# Altium PCB RX.PCBDOC
Units mil, origin at the board's own origin, x right, y up, seen from the top; angles counter-clockwise.
Board outline 1033.41 x 1033.93 mil, 4 copper layers (Top Layer, MidLayer1, MidLayer2, Bottom Layer); 70 components, 48 nets, 215 pads, 52 vias.
Unrouted connection lines stored in the file: 1.
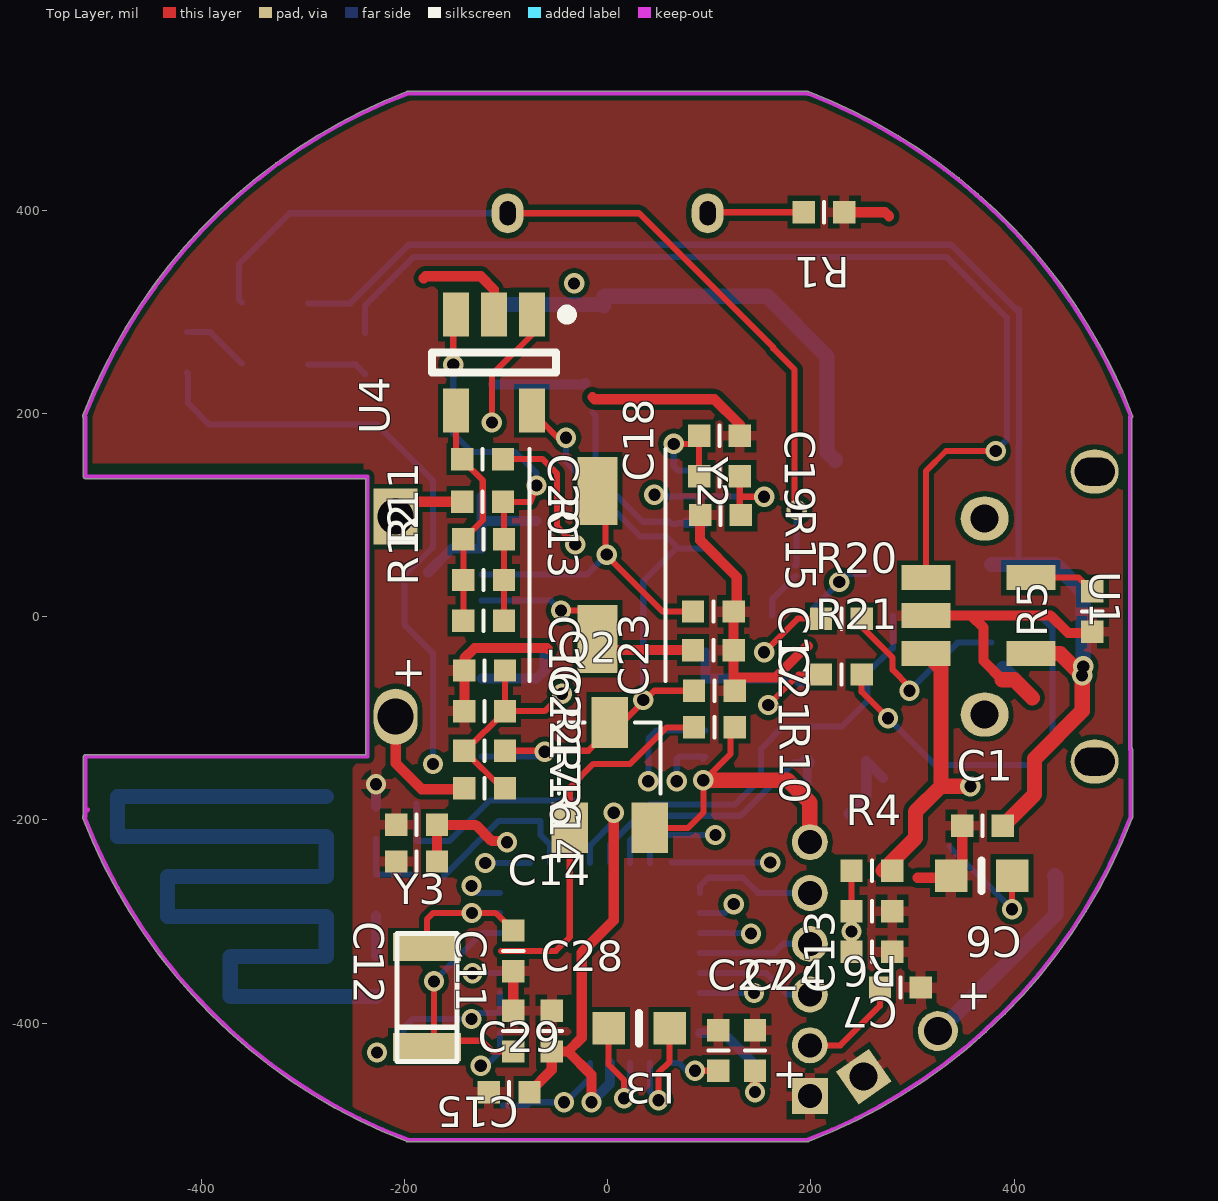
[diagram p0: Top Layer view]
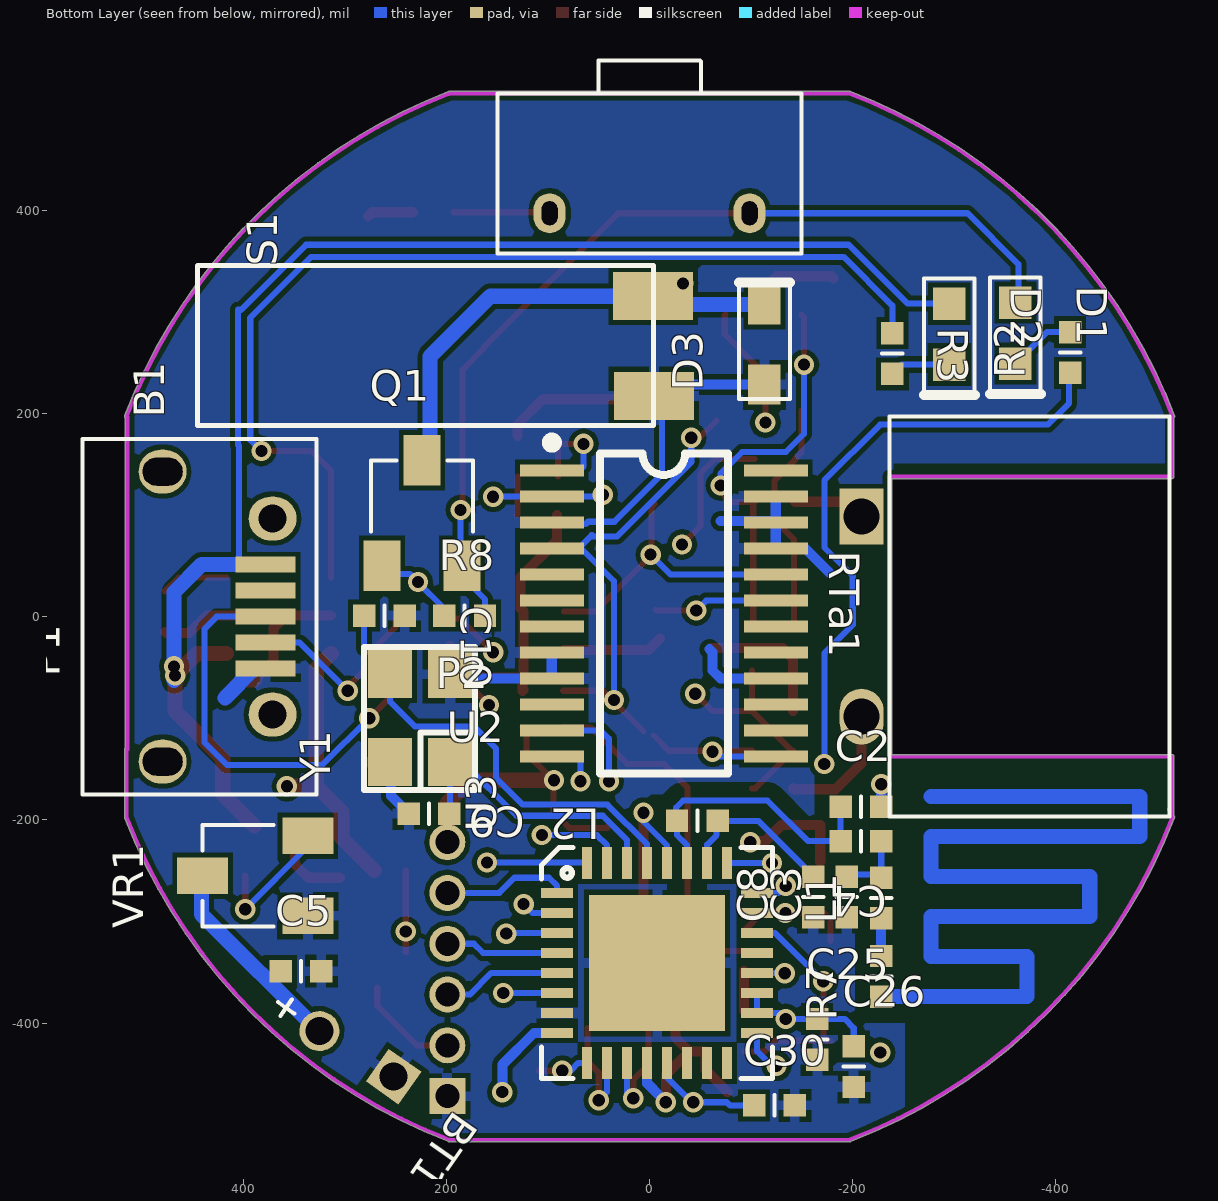
[diagram p1: Bottom Layer view, seen from below]
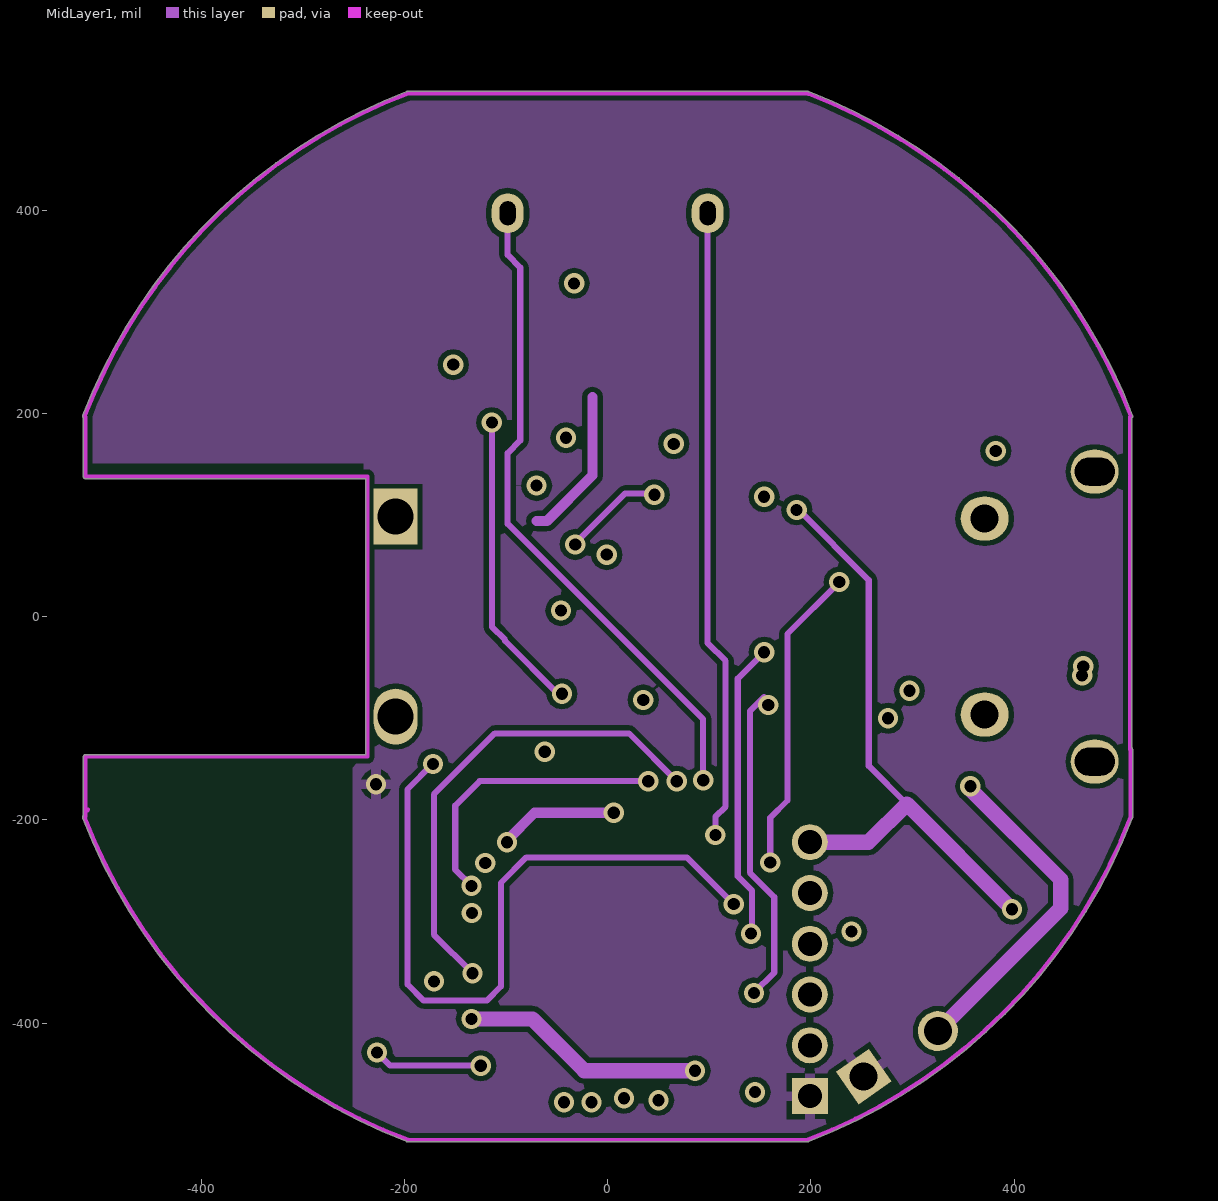
[diagram p2: MidLayer1]
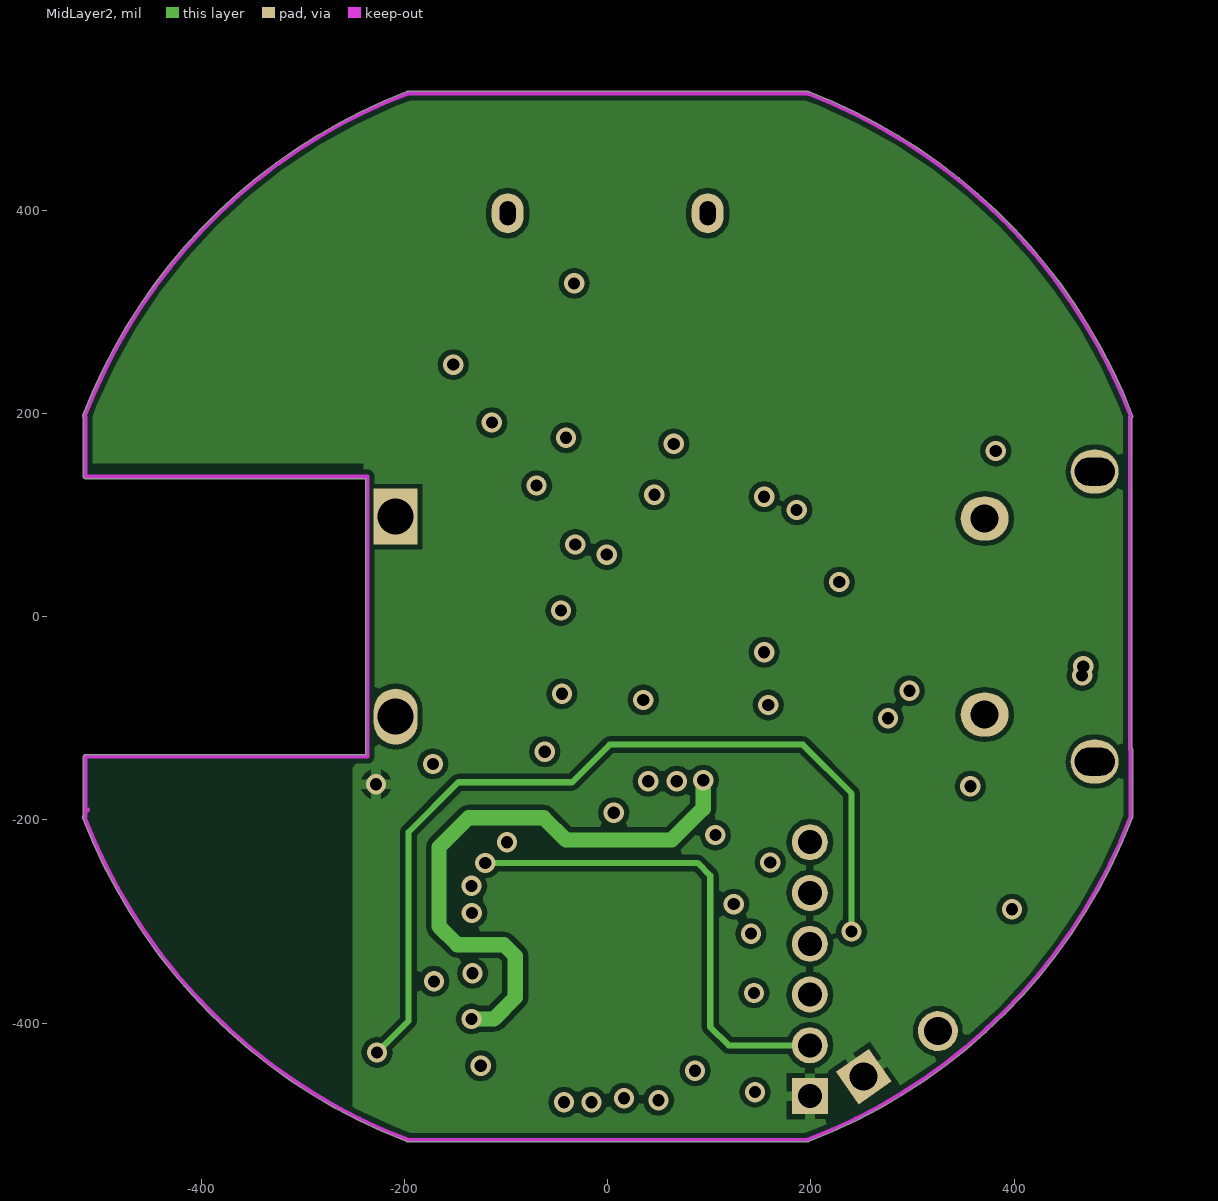
[diagram p3: MidLayer2]

## Layer stack, top to bottom
Top Layer: signal copper 1.4
Dielectric: prepreg 12.6, FR-4, Dk 4.8
MidLayer1: signal copper 1.4
Dielectric: core 12.6, FR-4, Dk 4.8
MidLayer2: signal copper 1.4
Dielectric: prepreg 12.6, FR-4, Dk 4.8
Bottom Layer: signal copper 1.4

## Board outline
-516.46,-198.15 cw(c-514.61,-197.44) -516.49,-198.06 cw(c-514.67,-197.26) -516.08,-195.86 -515.98,-195.76 -515.98,-137.8 cw(c-514,-137.8) -514,-135.81 -238.2,-135.81 -238.2,135.81 -514,135.81 cw(c-514,137.8) -515.98,137.8 -515.98,195.6 cw(c-514.72,197.13) -516.58,197.84 cw(c0,0) -198.23,516.43 cw(c-196.85,515) -196.85,516.98 196.85,516.98 cw(c196.85,515) 198.23,516.43 cw(c0,0) 516.58,197.84 cw(c514.72,197.13) 516.71,197.13 cw(c514.72,197.13) 515.98,195.6 515.98,-129.18 cw(c514.61,-130.61) 516.59,-130.61 516.59,-197.44 cw(c514.61,-197.44) 516.46,-198.15 cw(c0,0) 198.15,-516.46 cw(c196.85,-514.96) 196.85,-516.94 -196.85,-516.94 cw(c-196.85,-514.96) -198.15,-516.46 cw(c0,0)

## Design rules (kind name [scope] priority, off if disabled: settings)
Clearance Clearance_1 [InNetClass('RF')] p1: gap=15
Clearance [All] p2: gap=5
ComponentClearance [All] p1: gap=5 collisioncheckmode=3 verticalgap=5 showdistances=FALSE
FabricationTestpoint [(IsPad And (OnTopLayer Or OnBottomLayer))] p1: side=3 testpointundercomponent=TRUE minsize=40 maxsize=100 preferedsize=60 minholesize=0 maxholesize=40 preferedholesize=32 testpointgrid=1 allowsidetop=TRUE allowsidebottom=TRUE usegrid=TRUE gridtolerance=0.01
PolygonConnect [All] p1: connectstyle=Relief reliefconductorwidth=10 reliefentries=4 polygonreliefangle="90 Angle"
RoutingCorners [All] p1: cornerstyle=Round minsetback=100 maxsetback=100
RoutingVias [All] p1: holewidth=12 width=20 viastyle="Through Hole" minholewidth=12 minwidth=20 maxholewidth=28 maxwidth=50
SilkscreenOverComponentPads SilkToSolderMaskClearance [IsPad] p1: minsilkscreentomaskgap=10
SolderMaskExpansion [All] p1: expansion=4
Width [All] p1: maxlimit=15 minlimit=6 preferedwidth=6
24 further rules are at their usual default settings.

## Classes and differential pairs
net class RF: NetC2_1 NetC3_2 NetE1_1 NetL1_1

## Components (designator, comment, footprint, x,y, rotation, side; value= is the part's Value field where it differs from the comment)
B1 "Motor" "MOTO-40*44*114 - 3D" -4,267 r90 bottom
BT1 "Battery" BT 325,-408 r215 bottom
C1 "1uF" 0402 349,-206 r0 top
C2 "1.2pF/10V" 0402 -188,-187 r180 bottom
C3 "1.8pF/10V" 0402 -194,-296 r90 bottom
C4 "220pF/10V" 0402 -228,-221 r0 bottom
C5 "1uF" 0402 363,-349 r180 bottom
C6 "22uF" 0603 398,-255 r180 top
C7 "100nF" 0402 280,-330 r180 top
C8 "18pF/10V" 0402 -161,-296 r90 bottom
C9 "12pF" 0402 197,-194 r0 bottom
C10 "12pF" 0402 281,1 r180 bottom
C11 "0.1uF/10V" 0402 -208,-205 r0 top
C12 "2.2uF/10V" 0402 -208,-241 r0 top
C13 "1uF/10V" 0402 308,-365 r180 top
C14 "6pF" 0402 -93,-349 r90 top
C15 "6pF" 0402 -93,-388 r270 top
C16 "Cap" 0402 -142,-4 r0 top
C17 "Cap" 0402 84,5 r0 top
C18 "Cap" 0402 130,138 r180 top
C19 "Cap" 0402 90,178 r0 top
C20 "Cap" 0402 -143,155 r0 top
C21 "Cap" 0402 84,-33 r0 top
C22 "Cap" 0402 -141,-53 r0 top
C23 "0.1uF" 0402 125,-73 r180 top
C24 "1uF/10V" 0402 145,-407 r270 top
C25 "0.1uF/10V" 0402 -165,-436 r90 bottom
C26 "1uF/10V" 0402 -201,-463 r90 bottom
C27 "1uF/10V" 0402 109,-407 r270 top
C28 "1uF/10V" 0402 -55,-388 r270 top
C29 "0.1uF/10V" 0402 -117,-468 r0 top
C30 "1uF/10V" 0402 -143,-481 r0 bottom
D1 "LEDG" LED0603#1 -360,279 r270 bottom
D2 "LEDR" LED0603#1 -295,278 r270 bottom
D3 "IN4148" LED0603#2 -113,269 r90 bottom
L1 "1.8nH" 0402 -228,-297 r90 bottom
L2 "1.3nH" 0402 -67,-201 r0 bottom
L3 "47uH" 0603 61,-405 r180 top
P1 "microUSB" MICROUSB 377.95,0 r90 bottom
P2 "Header 6" SIP6-1.27 199,-472 r90 bottom
Q1 "AO3401A" AO3401 224,102 r180 bottom
Q2 "AO3401A" AO3401 2,-156 r0 top
R1 "10K" 0402 233,398 r180 top
R2 "1K" 0402 -414,240 r90 bottom
R3 "1K" 0402 -239,279 r270 bottom
R4 "2M" 0402 240,-250 r0 top
R5 "2K" 0402 477,-15 r90 top
R6 "200K" 0402 280,-290 r180 top
R7 "0" 0402 -228,-374 r90 bottom
R8 "10K" 0402 202,1 r180 bottom
R10 "10K" 0402 85,-109 r0 top
R11 "Res2" 0402 -102,76 r180 top
R12 "Res2" 0402 -102,36 r180 top
R13 "Res2" 0402 -143,113 r0 top
R14 "Res2" 0402 -141,-169 r0 top
R15 "Res2" 0402 91,100 r0 top
R16 "Res2" 0402 -141,-132 r0 top
R17 "Res2" 0402 -141,-93 r0 top
R20 "0R" 0402 210,-2 r0 top (schematic designator R5)
R21 "0R" 0402 210,-57 r0 top (schematic designator R5)
RTa1 "RX-40K" US-10MM -196.85,0 r180 bottom
S1 "开关" SW3x6x5 0,397 r0 bottom
U1 "TP4054" TP4054 365,1 r270 top
U2 "TLSR8258F512ET32" QFN-32 91,-272 r180 bottom
U3 "CS102" TSSOP24 -14,3 r90 bottom
U4 "LMV321" MF05A_N -112,250 r90 top
VR1 "MCP33" MCP33 440,-255 r90 bottom
Y1 "24M" XTAL4TN_3225 226,-100 r90 bottom
Y2 "8M" 5032 -10,51 r270 top
Y3 "32.768K" XTAL3215 -178,-325 r270 top

## Footprints (in the part's own frame and the unit in brackets; to place one, negate y for a bottom-side part, rotate by r counter-clockwise, add the part's x,y. Pads: shape width x height; smd on the part's side, far side on the other; paste and mask are expansions set on the pad)
0402 [mil]
  rect 22x22 smd: 1(0,0) 2(40,0)
  silkscreen extent 20,-10 20,10
0603 [mil]
  rect 32x32 smd: 1(0,0) 2(60,0)
  silkscreen extent 30,-15 30,15
5032 [mm]
  rect 1.7x1 smd: 1(-1.85,0) 2(1.85,0)
  silkscreen extent -2.9,-1.7 2.9,1.7
AO3401 [mm]
  rect 0.915x1.27 smd: 1(-1,-1.318) 2(1,-1.318) 3(0,1.318)
  silkscreen extent -1.27,-0.46 1.27,1.32
BT [mm]
  round 1 hole 0.7: 1(0,0)
  rect 1x1 hole 0.7: 2(2.172,0.133)
  silkscreen extent -1.27,-0.25 -0.76,0.25
LED0603#1 [mil]
  rect 32x32 smd: 1(-30,0) 2(30,0)
  silkscreen extent -55,-25 60,25
LED0603#2 [mil]
  rect 39.37x32 smd: 1(-40.65,0) 2(38.09,0)
  silkscreen extent -55,-25 60,25
MCP33 [mm]
  rect 0.915x1.27 smd: 1(0,0) 2(-1,-2.635) 3(1,-2.635)
  silkscreen extent -1.27,-1.78 1.27,0
MF05A_N [mm] "SOT23, 5-Leads, Body 2.9x1.6mm, Pitch 0.95mm, Lead Span 2.8mm, IPC Medium Density"
  rect 1.1x0.65 smd: 1(1.2,-0.95) 2(1.2,0) 3(1.2,0.95) 4(-1.2,0.95) 5(-1.2,-0.95)
  silkscreen extent -0.25,-1.95 1.32,1.55, body extent -0.9,-1.55 0.9,1.55, height 1.22
MICROUSB [mm]
  rect 0.4x1.5 smd: 1(-1.3,0) 2(-0.65,0) 3(0,0) 4(0.65,0) 5(1.3,0)
  oval 1.1x1.2 hole 0.7 slot 1 at 90 deg: ""(-3.625,2.575) ""(3.625,2.575)
  oval 1.1x1.2 hole 0.7: ""(-2.45,-0.175) ""(2.45,-0.175)
  silkscreen extent -4.44,-1.27 4.44,4.57
"MOTO-40*44*114 - 3D" [mm]
  rect 1.2x2 smd: 1(-1.263,-0.009) 2(1.228,0.012)
  silkscreen extent -2,0 2,11.4, body extent -2,0 1.99,10.55, height 3.4
QFN-32 [mm]
  rect 0.8x0.25 smd: 1(0,0) 2(0,-0.5) 3(0,-1) 4(0,-1.5) 5(0,-2) 6(0,-2.5) 7(0,-3) 8(0,-3.5) 17(5,-3.5) 18(5,-3) 19(5,-2.5) 20(5,-2) 21(5,-1.5) 22(5,-1) 23(5,-0.5) 24(5,0)
  rect 0.25x0.8 smd: 9(0.75,-4.25) 10(1.25,-4.25) 11(1.75,-4.25) 12(2.25,-4.25) 13(2.75,-4.25) 14(3.25,-4.25) 15(3.75,-4.25) 16(4.25,-4.25) 25(4.25,0.75) 26(3.75,0.75) 27(3.25,0.75) 28(2.75,0.75) 29(2.25,0.75) 30(1.75,0.75) 31(1.25,0.75) 32(0.75,0.75)
  rect 3.4x3.4 smd: 33(2.5,-1.75)
  silkscreen extent -0.39,-4.64 5.39,1.14
SIP6-1.27 [mm]
  rect 0.9x0.9 hole 0.6: 1(0,0)
  round 0.9 hole 0.6: 2(1.27,0) 3(2.54,0) 4(3.81,0) 5(5.08,0) 6(6.35,0)
SW3x6x5 [mm]
  oval 0.8x1 hole 0.4 slot 0.6 at 90 deg: 1(-2.5,0) 2(2.5,0)
  silkscreen extent -3.8,-3.81 3.8,1
TP4054 [mm]
  rect 0.62x1.22 smd: 1(-0.95,-1.31) 2(0,-1.31) 3(0.95,-1.31) 4(0.95,1.31) 5(-0.95,1.31)
TSSOP24 [mm] "Shrink Small Outline; 24 Leads; Body Width 4.4 mm; Pitch 0.65 mm"
  rect 0.3x1.6 smd: 1(3.575,2.8) 2(2.925,2.8) 3(2.275,2.8) 4(1.625,2.8) 5(0.975,2.8) 6(0.325,2.8) 7(-0.325,2.8) 8(-0.975,2.8) 9(-1.625,2.8) 10(-2.275,2.8) 11(-2.925,2.8) 12(-3.575,2.8) 13(-3.575,-2.8) 14(-2.925,-2.8) 15(-2.275,-2.8) 16(-1.625,-2.8) 17(-0.975,-2.8) 18(-0.325,-2.8) 19(0.325,-2.8) 20(0.975,-2.8) 21(1.625,-2.8) 22(2.275,-2.8) 23(2.925,-2.8) 24(3.575,-2.8)
  silkscreen extent -4,-1.6 4.4,2.93
US-10MM [mm]
  oval 1.1x1.4 hole 0.9: +(0.3,-2.5)
  rect 1.1x1.4 hole 0.9: -(0.3,2.5)
  silkscreen extent 1,-5 8,5
XTAL4TN_3225 [mm]
  rect 1.2x1.1 smd: 1(-1.1,-0.75) 2(1.1,0.75) 3(1.1,-0.75) 4(-1.1,0.75)
  silkscreen extent -1.8,-1.38 1.79,1.4
XTAL3215 [mm]
  rect 0.7x1.7 smd: 1(2.5,0) 2(0,0)
  silkscreen extent -0.33,-0.75 2.87,0.75

## Part data
B1: "Motor, General Kind"
BT1: "Multicell Battery"
C1 C2 C3 C4 C5 C6 C7 C8 C9 C10 C11 C12 C13 C14 C15 C23 C24 C25 C26 C27 C28 C29 C30: library part Cap, "Capacitor"
C16 C17 C18 C19 C20 C21 C22: "Capacitor"
D1 D2: library part LED0, "Typical INFRARED GaAs LED"
D3: library part Diode, "Default Diode"
L1 L2 L3: library part Inductor, "Inductor"
P1: library part "Header 5", "Header, 5-Pin"
P2: "Header, 6-Pin"
Q1 Q2: library part "AO3401A P道沟 X13A15 SOT-23", "MOS(场效应管)"
R1 R2 R3 R4 R5 R6 R7 R8 R10 R20 R21: library part Res1, "Resistor"
R11 R12 R13 R14 R15 R16 R17: "Resistor"
RTa1: library part TC40K
S1: library part SW-SPST, "Single-Pole, Single-Throw Switch"
U3: library part CS100
U4: library part LMV321M5, "General Purpose, Low Voltage, Rail-to-Rail Output Operational Amplifiers"
VR1: library part "Volt Reg", "Voltage Regulator"
Y1 Y2 Y3: library part XTAL, "Crystal Oscillator"

## Via types
v1: diameter 20, hole 12, Top Layer to Bottom Layer, 27 vias
v2: diameter 20, hole 12, Top Layer to Bottom Layer, tented both sides, 25 vias

## Nets (pads, with @x,y where several pads share a name; then routed paths per layer and width w, separated by ;. In a path a pad name is that pad's centre, name@x,y a point inside that pad or via, vN(x,y) a via of type N, cw(c..) or ccw(c..) an arc to the next point about the centre after c; other vN are vias at no path point)
1.2V: C11.2 C12.2 C28.2 C29.2 U2.12 U2.28 | length 702.2
  Top Layer w10: C12.2 C11.2 -130,-205 -114,-221 v2@-99,-221 ; C29.2 -55,-446 C28.2 -39,-428 ; v2(-16,-478) -16,-451 -39,-428 ; v2(6,-193) 6,-299 -25.5,-330.5 -25.5,-414.5 -39,-428
  MidLayer1 w10: v2@-99,-220 -72,-193 v2(6,-193)
  Bottom Layer w6: U2.28 -17.27,-225.27 v2@6,-202
  Bottom Layer w10: v2(-16,-478) -4,-466 ; -4,-465.72 2.42,-459.3 U2.12
  other v2: -99,-222
+3.3V: C6.1 C25.2 C26.2 C27.2 D1.1 P2.6 Q1.2 Q2.2 R8.2 R10.2 S1.1 U2.9 U2.18 U2.19 VR1.3 | length 3589.9
  Top Layer w6: S1.1 31,397 163,265 ; Q2.2@41.37,-206.63 Q2.2 79.13,-207.87 94.5,-192.5 94.5,-161.5 95,-161 121,-135 121,-113 R10.2 ; v2@91,-447 C27.2 ; 163,264 184,243 v1@184,107 ; v1(398,-288) C6.1
  Top Layer w15: v1(94,-161) 95,-161 177,-161 199,-183 P2.6
  MidLayer1 w6: S1.1 -98.43,356 -86,343.57 -86,173.43 -98.43,161 -98.43,91.43 94,-101 v1(94,-161) ; v1(186,105) 188,105 257,36 257,-147 294.42,-184.42 ; v1@396,-290 v1(398,-288)
  MidLayer1 w15: v2(-134,-396) -74,-396 -23,-447 v2(86,-447) ; P2.6 256.85,-222 294.42,-184.42 v1(398,-288)
  MidLayer2 w15: v2(-134,-396) -112,-396 -91,-375 -91,-334 -102,-323 -148,-323 -166,-305 -166,-227 -137,-198 -63,-198 -41,-220 63,-220 94,-189 v1(94,-161)
  Bottom Layer w6: D1.1 -363,312 -363,347 -313,397 S1.1 ; C26.2 -201,-405 -192,-396 C25.2 v2(-134,-396) -128.11,-390.11 U2.18 U2.19 ; U2.9 70,-439.32 77.68,-447 v2(86,-447) ; R8.2 162,17 Q1.2@185,40 ; Q1.2 186,51.5 v1(186,105) ; VR1.3@336.26,-226.26 v1(398,-288)
+5V: C1.2 D2.1 P1.5 U1.4 | length 1429.7
  Top Layer w15: C1.2 420,-175 420,-140 467,-93 v1(467,-58) 445.4,-36.4 U1.4
  Bottom Layer w6: D2.1 -253.97,308 -195.97,366 338,366 402,302 405,302 405,169.03 404.18,168.21 P1.5@404.18,51.18
  Bottom Layer w15: P1.5 404.18,51.18 440.82,51.18 468,24 v1(468,-49) v1@468,-63
ADC0: C7.2 R4.1 R6.2 U2.17 | length 1093.5
  Top Layer w6: C7.2 R4.1
  MidLayer1 w6: v2(-227,-429) -214,-442 v2(-125,-442)
  MidLayer2 w6: v2(-227,-429) -196,-398 -196,-212 -147,-163 -35,-163 2,-126 192,-126 240,-174 v2(240,-310)
  Bottom Layer w6: v2(-125,-442) -125,-446 -124,-446 -105.85,-427.85 U2.17
CS102-EN: Q2.1 R10.1 U2.21 | length 368.1
  Top Layer w6: -105,-329 -51,-329 -37.37,-315.37 Q2.1 ; Q2.1@-38,-208.5 Q2.1 ; R10.1 58,-109 22,-145 -14,-145 -37.37,-168.37 Q2.1
CS102-T: U2.20 U3.12 | length 556.7
  MidLayer1 w6: v2(-133,-351) -171,-313 -171,-175 -111,-115 21,-115 v1(68,-162)
  Bottom Layer w6: v2(-133,-351) -132.74,-350.74 U2.20 ; v1(68,-162) 68,-140 70.25,-137.75 U3.12 U3.12@93.98,-140
ECHO: U2.24 U3.11 | length 417.9
  MidLayer1 w6: v2(-134,-265) -150,-249 -150,-186 -126,-162 v2(40,-162)
  Bottom Layer w6: v2(-134,-265) -127,-272 U2.24 ; v2(40,-162) 40,-120 47.84,-112.16 60.84,-112.16 ; 61,-112.16 U3.11
GND: B1.1 BT1.2 C1.1 C2.2 C3.1 C5.2 C6.2 C7.1 C8.1 C9.2 C10.2 C11.1 C12.1 C13.1 C14.1 C15.1 C17.2 C19.2 C21.2 C22.1 C23.1 C24.1 C25.1 C26.1 C27.1 C28.1 C29.1 C30.1 D3.1 P1.1 P2.1 R1.1 R5.1 R6.1 R15.1 R17.1 U1.2 U2.7 U2.33 U3.3 U3.8 U3.9 U3.16 U3.21 U3.22 U3.23 U4.2 VR1.2 Y1.3 Y1.4 | length 2104.6
  Top Layer w10: -181,333 -179,335 -125,335 -112,322 U4.2 ; R17.1 -141,-41 -131,-31 -60,-31 -59,-32 ; C15.1 C14.1 ; -15,216 -13,214 105,214 130,189 C19.2 ; R15.1 91,75 127,39 127,8 C17.2 124,-60 ; C23.1@124,-72 C23.1 125,-61 124,-60 ; 197,-29 196.2,-29 165.2,-60 124,-60 ; R1.1 273,398 277,394 ; 305,-257 336,-257 349,-244 C1.1 ; U1.2 358,1 ; 388.4,-62.11 370,-43.71 370,-11 358,1 ; R5.1 476,-16 453,-16 436,1 358,1
  Top Layer w15: 388.4,-62.11 400.11,-62.11 418,-80
  MidLayer1 w10: -70,94 -60,94 -15,139 -15,216
  Bottom Layer w6: B1.1@-15,201 -12.03,198.03 -12.03,140 34.65,93.32 60.65,93.32 62.97,91 68,91 69,92 U3.3@77,92 ; P1.1 P1.1@389.18,-51.18
  Bottom Layer w10: C2.2 v2(-228,-165) ; -176.6,43.6 -153.22,66.98 U3.21 U3.22 U3.22@-124.24,94 ; U3.16 -69.98,-60.98 -62,-53 -62,-35 -59,-32 ; U3.23 U3.22@-124.24,94 ; D3.1 -23.65,228.35 B1.1@-22,230 ; -70,94 U3.22@-124.24,94 ; U3.3@77,92 77.57,92.57 U3.3 ; U3.8 U3.9 185.98,-60.98 Y1.3@190,-65 ; C9.2 254.53,-176.47 254.53,-142.31 Y1.4 Y1.4@271,-158.78
  Bottom Layer w15: P1.1@389.18,-51.18 418,-80
LED: R2.1 U2.2 | length 1333.9
  MidLayer1 w6: v2(-172,-145) -197,-170 -197,-362 -181,-378 -119,-378 -105,-364 -105,-262 -80,-237 78,-237 v2(124,-283)
  Bottom Layer w6: R2.1 -413,239 -413,210 -392,189 -227,189 -172,134 -172,68 -200,40 -200,-8 -172,-36 v2(-172,-145) ; U2.2 115.31,-291.68 v2(124,-283)
M-EN: Q1.1 R8.1 U2.32 | length 476.7
  MidLayer1 w6: v2(160,-242) 160,-198 177,-181 177,-17 v1(228,34)
  Bottom Layer w6: U2.32@63,-242 v2(160,-242) ; R8.1 202,8 v1(228,34) 236,42 255,42 Q1.1@256,43
NetB1_2: B1.2 D3.2 Q1.3 | length 459
  Bottom Layer w15: D3.2 -5.09,307.09 B1.2@-4,306 ; B1.2 156.64,315.36 216,256 216,161.87 Q1.3
  other v1: -33,328
NetC2_1: C2.1 C4.2 L2.2 U2.27 | length 275.1
  Bottom Layer w6: C4.2 -156,-221 -116,-181 -33,-181 -26,-188 L2.2@-26,-201 ; C4.2@-188,-219 C2.1 C2.1@-188,-184 ; U2.27 -36.95,-224.95 -27,-215 L2.2
NetC3_2: C3.2 C4.1 L1.2 | length 69
  Bottom Layer w6: C4.1@-228,-219 -228,-254 C3.2@-194,-254
NetC8_2: C8.2 L2.1 U2.26 | length 163.7
  Bottom Layer w6: C8.2 -161,-255 -107,-201 L2.1 -66,-201 -66,-215 -56.64,-224.36 U2.26
NetC9_1: C9.1 U2.30 Y1.1 | length 301.1
  Bottom Layer w6: U2.30 22.1,-219.9 46,-196 131,-196 183.69,-143.31 196,-143.31 Y1.1 196.47,-193.47 C9.1
  Bottom Layer w8: Y1.1@196.47,-164.47 Y1.1
  Bottom Layer w15: Y1.1@196,-143.31 Y1.1@196,-143
NetC10_1: C10.1 U2.29 Y1.2 | length 444
  Bottom Layer w6: U2.29 2.42,-224.03 41.44,-185 125.03,-185 151,-159.03 151,-130 173,-108 231,-108 255.53,-83.47 Y1.2 ; Y1.2@254,-57 281,-30 ; 281,-31.22 281,-30 ; C10.1 281,-30
NetC14_2: C14.2 U2.23 Y3.2 | length 143.6
  Top Layer w6: Y3.2@-178,-319 -178,-298 -171.68,-291.68 v2(-133.68,-291.68) -110.32,-291.68 C14.2
  Bottom Layer w6: v2(-133.68,-291.68) U2.23
NetC15_2: C15.2 U2.22 Y3.1 | length 230.7
  Top Layer w6: Y3.1@-178,-417.43 -124.12,-417.43 -113.54,-428 C15.2 ; Y3.1@-171,-415.43 v2(-171,-359)
  Bottom Layer w6: v2(-171,-359) -123.37,-311.37 U2.22
NetC16_1: C16.1 C20.1 R11.2 R12.2 U4.4 | length 225.6
  Top Layer w6: U4.4 -149.4,161.4 C20.1 -143,154 -123,134 -123,95 R11.2 C16.1
NetC16_2: C16.2 R11.1 R12.1 R13.2 U4.3 | length 390
  Top Layer w6: v1(-152,248) -152,294.65 U4.3 ; C16.2 -102,112 R13.2 -76,113 v1(-70,129)
  Bottom Layer w6: v1(-152,248) -152,180 -134,162 -91,162 -70,141 v1(-70,129)
NetC17_1: C17.1 U3.20 Y2.1 | length 291.8
  Top Layer w6: Y2.1@-5,111 -2,108 -2,61 54,5 C17.1
  Bottom Layer w6: U3.20 -20.61,41.39 v1(-1,61)
NetC21_1: C21.1 U3.19 Y2.2 | length 221.3
  Top Layer w6: v1(-46,6) -7,6 Y2.2@-6,7
  Top Layer w10: Y2.2 1.17,-33 C21.1
  Bottom Layer w6: U3.19 -55.8,15.8 v1(-46,6)
NetC22_2: C22.2 R14.2 R16.1 R17.2 U4.1 | length 635.5
  Top Layer w6: v1(-114,191) -114,238 -74,278 -74,296.65 U4.1 ; R14.2 -104,-169 R16.1 -140,-132 R17.2 ; C22.2 R17.2 ; v1(-45,-76) -62,-93 R17.2
  MidLayer1 w6: v1(-114,191) -114,-10 -101,-23 -101,-24 -49,-76 v1(-45,-76)
NetC24_2: C24.2 U2.8 | length 114.9
  Top Layer w9.84: v2(145,-468) C24.2
  Bottom Layer w9.84: U2.8 113.8,-409.8 145,-441 v2(145,-468)
NetC30_2: C30.2 U2.13 | length 111.5
  Bottom Layer w6: C30.2 -79,-481 -76,-478 v2(-43,-478) -41.46,-478 -17.27,-453.81 U2.13
NetD1_2: D1.2 R2.2 | length 66.8
  Bottom Layer w6: R2.2 -391,280 D1.2
NetD2_2: D2.2 R3.2 | length 59.7
  Bottom Layer w6: D2.2 -248,248 R3.2
NetE1_1: R7.1 | length 1158.1
  Bottom Layer w15: -277,-177.06 -482.35,-177.06 -482.35,-216.45 -277,-216.45 -277,-255.83 -433.35,-255.83 -433.35,-295.22 -277,-295.22 -277,-334.61 -371.37,-334.61 -371.37,-374 R7.1
NetL1_1: L1.1 R7.2 | length 40
  Bottom Layer w9.84: R7.2 L1.1@-228,-294
NetL3_1: L3.1 U2.10 | length 129.1
  Top Layer w6: v2(50,-476) 50,-449 61,-438 L3.1
  Bottom Layer w6: U2.10@41.79,-452.79 U2.10 41.79,-467.79 v2(50,-476)
NetL3_2: L3.2 U2.11 | length 112.4
  Top Layer w6: L3.2 1,-441 16,-456 v2(16,-474)
  Bottom Layer w6: v2(16,-474) 22.1,-467.9 U2.11
NetP1_2: P1.2 R20.2 | length 191.1
  Top Layer w6: R20.2 250,-10 280.41,-40.41 280.41,-52.33 297,-68.92 v1(297,-73)
  Bottom Layer w6: v1(297,-73) 344.41,-25.59 P1.2
NetP1_3: P1.3 R21.2 | length 421
  Top Layer w6: R21.2 250,-74 v1(276,-100)
  Bottom Layer w6: v1(276,-100) 322,-146 416,-146 438,-124 438,-12 426,0 P1.3
NetR3_1: R3.1 U1.1 | length 1021
  Top Layer w6: U1.1 313.43,143.43 333,163 v1(382,163)
  Bottom Layer w6: R3.1 -239,306 -191,354 333.03,354 393,294.03 393,174 v1(382,163)
NetR5_2: R5.2 U1.5 | length 66
  Top Layer w6: U1.5 463.6,38.4 R5.2
NetR13_1: R13.1 RTa1.- | length 61.4
  Top Layer w10: RTa1.-@-204,114 -203,113 R13.1
NetR14_1: R14.1 RTa1.+ | length 124.6
  Top Layer w10: RTa1.+ -208.66,-144.34 -183,-170 -142,-170 R14.1
RESET: C13.2 P2.2 U2.25 | length 628.5
  Top Layer w6: P2.2 229,-422 268,-383 C13.2
  MidLayer2 w6: v2(-120.53,-242.47) 88.47,-242.47 101,-255 101,-404 119,-422 P2.2
  Bottom Layer w6: v2(-120.53,-242.47) U2.25
RN: C18.2 C19.1 U3.1 | length 112
  Top Layer w6: v1(65,170) 90,170 C18.2
  Bottom Layer w6: v1(65,170) 65,148 69.25,143.75 U3.1
RP: C18.1 C20.2 R15.2 U3.2 | length 407.2
  Top Layer w6: C20.2 -64,155 -50,141 -50,89 v1(-32,71) ; 130,118 v1(154,118) v1@155,117 ; C18.1 130,101 R15.2
  MidLayer1 w6: v1@-32,72 17,121 v1@46,121
  Bottom Layer w6: v1(46,120) 47.84,118.16 153.84,118.16 v1(154,118)
RX: R20.1 U2.3 | length 413
  Top Layer w6: v1(154,-35) 187,-2 R20.1
  MidLayer1 w6: v2(141,-312) 142,-311 142,-269.56 128,-255.56 128,-61 v1(154,-35)
  Bottom Layer w6: U2.3 v2@140.37,-311.37
SWM: P2.5 U2.1 | length 124.5
  Bottom Layer w6: U2.1 91,-265 99,-257 133,-257 148,-272 P2.5
SWS: P2.3 U2.5 | length 116.8
  Bottom Layer w6: U2.5 155.74,-350.74 177,-372 P2.3
TP: P2.4 U2.4 | length 111.8
  Bottom Layer w6: U2.4 163.94,-331.05 173,-322 P2.4
TX: R21.1 U2.6 | length 432.9
  Top Layer w6: v1(158,-87) 188,-57 R21.1
  MidLayer1 w6: v2(144,-370.43) 164,-350.43 164,-276 140,-252 140,-93 v1@154,-79
  Bottom Layer w6: U2.6 v2(144,-370.43)
VBAT: BT1.1 C5.1 R4.2 U1.3 VR1.1 | length 801.3
  Top Layer w15: R4.2@271,-250 303,-218 303,-192 328,-167 ; U1.3 328,-50.98 328,-167 ; v1(357,-167) 328,-167
  MidLayer1 w15: BT1.1 446,-287 446,-259 357,-170 v1(357,-167)
  Bottom Layer w15: BT1.1@326,-408 441,-293 441,-256 VR1.1
VCC-CS102: C23.2 Q2.3 R16.2 U3.4 U3.13 U4.5 | length 654.7
  Top Layer w6: R16.2 -19,-132 Q2.3@-4,-117 ; U4.5@-66,193 -49,176 v1(-41,176) ; Q2.3@6,-113 46,-73 C23.2
  Bottom Layer w6: U3.13 -66.75,-137.75 v1(-62,-133) ; v1(-41,176) -41,152 32,79 55.75,79 56.88,80.12 70,67 U3.4 ; v1(35,-82) 35,35 U3.4@67,67
WKUP: R1.2 S1.2 U2.31 | length 807.1
  Top Layer w6: S1.2 99.43,398 R1.2
  MidLayer1 w6: S1.2 98.43,-26 116,-43.57 116,-187 106,-197 v2(106,-215)
  Bottom Layer w6: U2.31 41.79,-225.21 52,-215 v2(106,-215) v2@106,-212
pads on no net: P1. P1.4 U2.14 U2.15 U2.16 U3.5 U3.6 U3.7 U3.10 U3.14 U3.15 U3.17 U3.18 U3.24

## Polygon pours and split planes (outlines as drawn)
GND on Bottom Layer "Bottom Layer-No Net" (solid, remove dead copper, pour order 1000): -568,177 -542,151 -240,151 -240,-82 -245,-87 -238.2,-93.8 -238.2,-135.81 -251,-148.61 -251,-149 -251,-503 -213,-541 -190,-564 157,-564 452,-564 533,-483 590,-426 590,317 530,317 233,614 214,633 -374,633 -403,633 -580,456 -564,440 -564,170
GND on Top Layer "Bottom Layer-No Net" (solid, remove dead copper, pour order 1001): -568,177 -542,151 -240,151 -240,-82 -245,-87 -238.2,-93.8 -238.2,-135.81 -251,-148.61 -251,-149 -251,-503 -213,-541 -190,-564 157,-564 452,-564 533,-483 590,-426 590,317 530,317 233,614 214,633 -374,633 -403,633 -580,456 -564,440 -564,170
GND on MidLayer1 "Bottom Layer-No Net" (solid, remove dead copper, pour order 1002): -568,177 -542,151 -240,151 -240,-82 -245,-87 -238.2,-93.8 -238.2,-135.81 -251,-148.61 -251,-149 -251,-503 -213,-541 -190,-564 157,-564 452,-564 533,-483 590,-426 590,317 530,317 233,614 214,633 -374,633 -403,633 -580,456 -564,440 -564,170
GND on MidLayer2 "Bottom Layer-No Net" (solid, remove dead copper, pour order 1003): -568,177 -542,151 -240,151 -240,-82 -245,-87 -238.2,-93.8 -238.2,-135.81 -251,-148.61 -251,-149 -251,-503 -213,-541 -190,-564 157,-564 452,-564 533,-483 590,-426 590,317 530,317 233,614 214,633 -374,633 -403,633 -580,456 -564,440 -564,170

## Keep-outs
Keep-Out Layer:
  lines w3.94: -514.72,197.13 cw(c0,0) -196.46,514.98 ; -514.67,-197.26 -514,-196.58 -514,-137.8 -236.22,-137.8 -236.22,137.8 -514,137.8 -514,196.4 ; -514.61,-197.44 ccw(c0,0) -197.13,-514.72 ; -512.03,-190.61 -511.35,-189.94 ; -196.85,-514.96 196.85,-514.96 ; -196.85,515 196.85,515 ; 197.13,-514.72 ccw(c0,0) 514.61,-197.44 514.61,-130.61 ; 197.44,514.61 cw(c0,0) 514.72,197.13 ; 514,-130.61 514,130 514,196.41

## Silkscreen, mask and mechanical layers (free items; w line width, h text height)
Top Overlay:
  text "+" at -213,-69 h30
  text "+" at 343,-387 h30
  text "+" at 162,-464 h30